# Altium PCB breaker.PcbDoc (part 2 of 2)
Units mil, origin at the board's own origin, x right, y up, seen from the top; angles counter-clockwise.
Board outline 1955 x 4025 mil, 2 copper layers (Top Layer, Bottom Layer); 93 components, 54 nets, 301 pads, 212 vias.
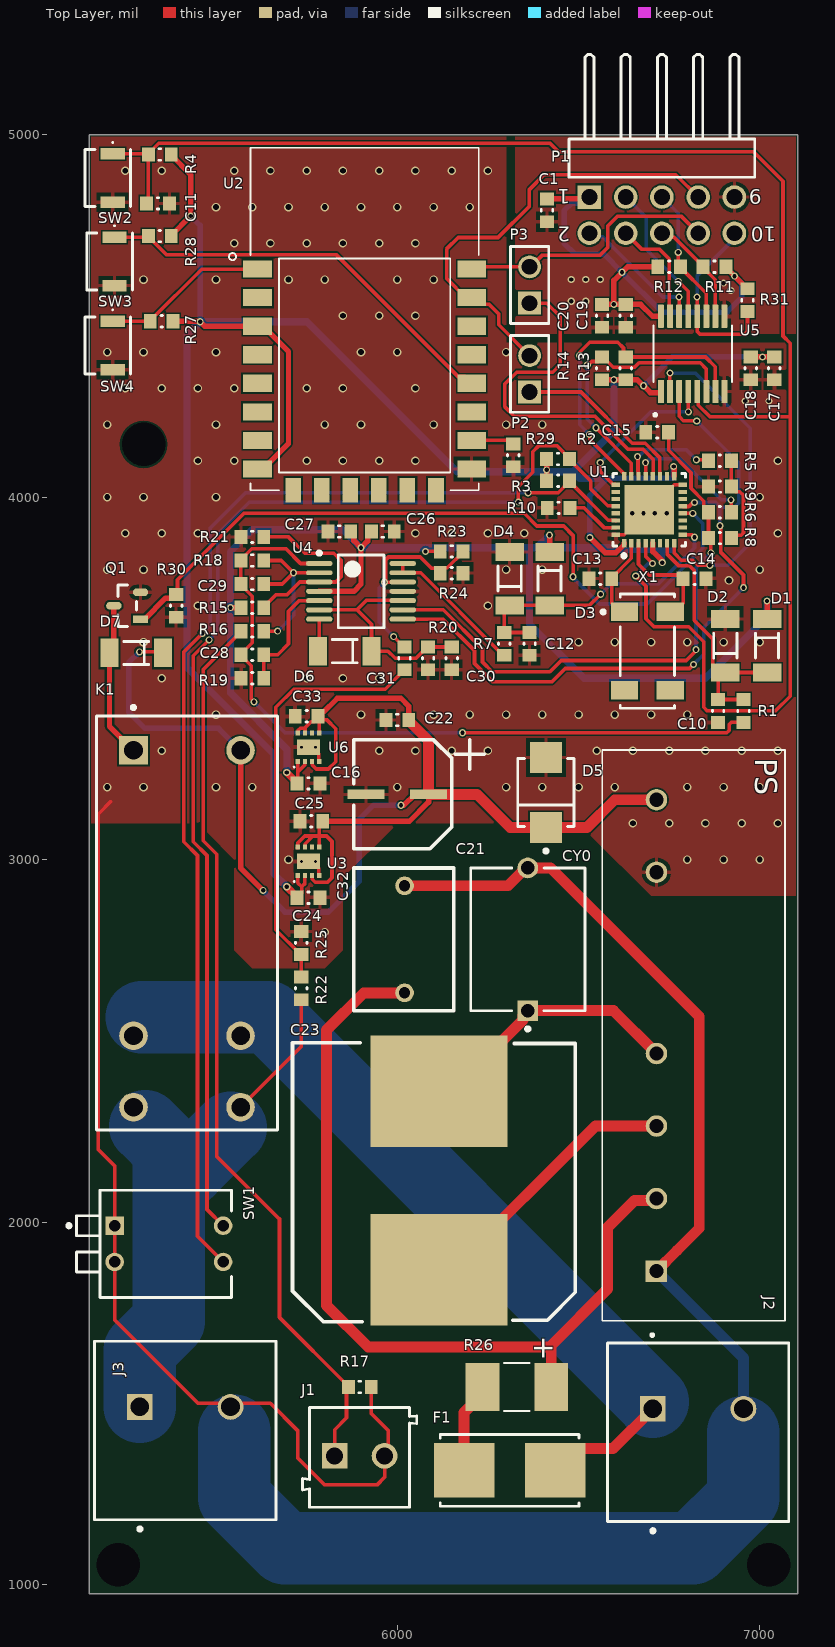
[diagram p0: Top Layer view]

## Via types
v1: diameter 23.62, hole 15.75, Top Layer to Bottom Layer, tented both sides, 133 vias
v2: diameter 19.68, hole 11.81, Top Layer to Bottom Layer, tented both sides, 71 vias
v3: diameter 19.68, hole 7.87, Top Layer to Bottom Layer, 4 vias
v4: diameter 19.68, hole 11.81, Top Layer to Bottom Layer, 3 vias
v5: diameter 23.62, hole 15.75, Top Layer to Bottom Layer, 1 vias

## Nets (pads, with @x,y where several pads share a name; then routed paths per layer and width w, separated by ;. In a path a pad name is that pad's centre, name@x,y a point inside that pad or via, vN(x,y) a via of type N, cw(c..) or ccw(c..) an arc to the next point about the centre after c; other vN are vias at no path point) (continued)
3V3_D: (continued)
  Top Layer w10: C24.2 5736.22,2907.72 5736.22,2924.8 ; U3.1 5725.47,2935.55 5736.22,2924.8 ; U3.2 5745.16,2933.74 5736.22,2924.8
  Top Layer w15: R28.2 5376.5,4721.97 v2(5430,4775.47) 5430,4889.53 5376.5,4943.03 R4.2 ; R27.2 5455,4485 v2(5456.25,4483.75) 5468.74,4471.26 U2.3 5630.2,4471.26 5700,4401.46 5700,4147.36 5630.2,4077.56 U2.8 ; R3.2 v2(6412.01,4075) R2.2 ; v2(6531.27,3888.27) 6531.73,3888.27 6574,3846 6602.34,3846 6626.1,3869.76 U1.1 ; R14.2 v2(6597.5,4323.5) R13.2 6662.5,4323.5 6698,4288 6726.93,4288 6727.5,4288.57 U5.1 ; v2(6762.45,4084.37) 6762.45,4083.1 6763.62,4081.93 6763.62,4057.8 U1.17 ; C18.1 v2(7007.5,4386.5) C17.1
  Top Layer w20: v2(5695,2925) 5695.47,2925 5723.5,2896.97 C24.2
  Bottom Layer w15: v2(5430,4775.47) 5456.25,4749.22 v2(5456.25,4483.75) ; v2(6531.27,3888.27) 6531.27,4004.73 6578.03,4051.5 C7.2 C5.1 C3.1 6761.55,4053.05 6761.55,4083.47 v2(6762.45,4084.37) ; v2(6679,4307) 6758.5,4386.5 v2(7007.5,4386.5)
  Bottom Layer w20: v2(5695,2925) 5660,2960 5660,3290 5420,3530 5420,4447.5 v2(5456.25,4483.75) 5751.25,4483.75 6165,4070 6412.01,4070 6485,4070 ; C9.1@6578.03,4051.5 6503.5,4051.5 6485,4070 ; v2(6597.5,4323.5) 6597.5,4182.5 6485,4070
3V3_EXT: C1.2 C19.2 C20.2 P1.1 R11.2 R12.2 R31.2 U5.16 | length 1412.4
  Top Layer w15: C1.2 6524.98,4822.5 P1.1 ; C20.2 v2(6597.5,4531.5) ; R12.2 6635,4635 v2(6620,4620) 6597.5,4597.5 v2(6597.5,4531.5) ; U5.16 6704.26,4498.74 6671.5,4531.5 C19.2 v2(6597.5,4531.5) ; R11.2 6906.5,4633.03 v2(6930.16,4609.37) 6953.81,4585.71 6953.81,4584.71 6964.03,4574.5 R31.2
  Bottom Layer w15: P1.1 6512.48,4810 6480,4810 6460,4790 6460,4700 6490,4670 6570,4670 v2(6620,4620) 6730,4510 6910,4510 6950,4550 6950,4589.53 v2(6930.16,4609.37)
5V: C21.1 C22.2 C25.2 C33.2 D5.1 D7.1 K1.8 PS.14 U3.3 U3.5 U3.7 U3.8 U6.3 U6.5 U6.7 U6.8 | length 4089.7
  Top Layer w10: v2(5289,3573) 5350.82,3573 D7.1 ; U3.8@5724.57,3032.92 5725,3033.35 5725,3045 5745,3065 5767.12,3065 ; U6.8 5726.38,3350.28 5726.38,3356.21 5732.24,3362.07 5743.94,3362.07 ; U3.7 5746.06,3035.28 5746.06,3043.94 5767.12,3065 ; U6.7 5746.06,3350.28 5746.06,3362.07 5743.94,3362.07 ; U3.3 5765.75,2954.72 5765.75,2946.06 5774.07,2937.74 5807.74,2937.74 5820,2950 5820,3050 5805,3065 5784.53,3065 ; U6.3 5765.75,3269.72 5765.75,3261.06 5776.81,3250 5810,3250 5830,3270 5830,3361.22 5805.98,3385.24 C33.2@5794.76,3385.24 ; U3.5 5784.53,3065 ; U6.5 C33.2@5784.53,3390 ; C25.2 5784.53,3095.94 5784.53,3065 ; C33.2@5794.76,3405.24 C33.2@5794.76,3385.24 ; 5743.94,3362.07 5762.18,3380.31 5768.78,3380.31 5781.5,3393.03 C33.2@5784.53,3390 ; 5767.12,3065 5784.53,3065 ; C33.2@5784.53,3390 5789.29,3385.24 C33.2@5794.76,3385.24
  Top Layer w15: K1.8 5567.64,2977.36 v2(5630,2915) ; C25.2 6033.71,3105.68 6086.61,3158.59 C21.1 6048.23,3180 6018.23,3150 v2(6010,3150) ; C33.2@5794.76,3405.24 5834.53,3445 6010,3445 6031.5,3423.5 C22.2
  Top Layer w30: C22.2 6031.5,3383.03 6086.61,3327.91 C21.1 6220,3180 6311.46,3088.54 D5.1 6523.54,3088.54 6600,3165 PS.14
  Bottom Layer w15: v2(5289,3573) 5259,3543 5259,3407 5304,3362 5507.02,3362 K1.8 ; v2(5630,2915) 5690,2855 5810,2855 5895,2940 5895,3110 5935,3150 v2(6010,3150)
ACL: F1.1 J2.1 K1.3 K1.6 | length 2189
  Top Layer w30: F1.1 6495.5,1375 6595,1375 J2.1
  Bottom Layer w200: 5295,2565 5645,2565 J2.1@6705,1505
DUART_RX: U1.25 U5.4 | length 439.6
  Top Layer w10: v2(6560,4095) 6560.31,4094.69 6560.31,4070.16 6595.67,4034.8 6601.57,4034.8 U1.25 ; U5.4 6802.75,4291.01 6802.75,4235.25 v2(6803,4235)
  Bottom Layer w10: v2(6560,4095) 6700,4235 v2(6803,4235)
DUART_TX: U1.8 U5.2 | length 929.1
  Top Layer w10: v2(6752,4342) 6752,4291.76 U5.2 ; U1.8 6763.9,3845.73 6783.63,3826 6815,3826 6829.13,3811.87 v2(6862.24,3811.87)
  Bottom Layer w10: v2(6752,4342) 6822,4342 6974,4190 6974,3873 6912.87,3811.87 v2(6862.24,3811.87)
ESP_RX: P1.7 P2.2 U2.21 | length 1247
  Top Layer w10: P2.2 6280,4475 6280,4505 6253.62,4531.38 6223.62,4531.38 U2.21 6189.25,4550 6136,4603.25 6136,4684 6168,4716 6278,4716 6364.5,4802.5 6364.5,4848.5 6405,4889 6768.52,4889 P1.7
ESP_RX_STM: P2.1 U1.19 | length 485.1
  Top Layer w10: P2.1 6365.31,4289.69 6506.77,4289.69 6648.14,4148.31 6677.95,4148.31 6683.79,4148.31 6724.53,4107.58 U1.19
ESP_TX: P1.8 P3.2 U2.22 | length 739.8
  Top Layer w10: U2.22 6211.26,4635 P3.2 6367.62,4635 6399.19,4666.57 6558.57,4666.57 6581,4689 6581,4748 6608,4775 6782.52,4775 P1.8
ESP_TX_STM: P3.1 U1.20 | length 986.5
  Top Layer w10: P3.1 6412,4535 6450,4497 6450,4366 6428.5,4344.5 6329.5,4344.5 6296,4311 6296,4250 6323,4223 6545.47,4223 6636.15,4132.31 6671.33,4132.31 6677.16,4132.31 6705.84,4103.63 6705.84,4084.43 6705.75,4084.33 6705.75,4058.43 U1.20
EXT_RST: P1.10 R31.1 U5.12 | length 513.3
  Top Layer w10: v2(6827,4552) 6827.5,4551.5 U5.12 6827.5,4456.5 6835,4449 6958,4449 6966,4457 R31.1
  Bottom Layer w10: v2(6827,4552) 6827,4610 6930,4713 P1.10
EXT_RX: P1.3 U5.13 | length 400.2
  Top Layer w10: v2(6775,4595) 6802.5,4567.5 U5.13
  Bottom Layer w10: P1.3 6686.52,4771 6686.52,4683.48 v2(6775,4595)
EXT_SWDCLK: P1.6 R11.1 U5.10 | length 303.3
  Top Layer w10: P1.6 6740.52,4717 6763.47,4717 6843.5,4636.97 R11.1 6843.5,4633.03 6877.5,4599.04 U5.10
EXT_SWDIO: P1.5 R12.1 U5.11 | length 379.5
  Top Layer w10: v2(6775,4675) 6775,4641.5 R12.1 6781.5,4633.03 6852.5,4562.03 U5.11
  Bottom Layer w10: P1.5 6775,4782.52 v2(6775,4675)
EXT_TX: P1.4 U5.15 | length 308.2
  Top Layer w10: P1.4 6673.48,4684.04 6722.42,4684.04 6750,4656.46 6750,4501.24 U5.15
FAULT_ISR: U1.13 U4.8 U5.3 | length 2001.5
  Top Layer w10: U4.8 6126.23,3663.23 6213,3576.45 6213,3541 6264,3490 6426,3490 6463,3527 6806,3527 v2(6817,3538) ; U5.3 6777.5,4222.5 6789.16,4210.84 6825.16,4210.84 v2(6826,4210) ; U1.13 6788.43,3973.94 6804.46,3973.94 6815.52,3985 v2(6820,3985) ; v2(6890,3921) 6891.85,3919.15 6891.85,3848.15 6955,3785 v2(6955,3750)
  Bottom Layer w10: v2(6817,3538) 6845,3566 6845,3640 v2(6955,3750) ; v2(6820,3985) 6878.36,3985 6889,3974.36 ; v2(6826,4210) 6941.59,4094.41 6941.59,3983.62 6929.38,3971.41 6891.95,3971.41 6889,3974.36 ; v2(6890,3921) 6890,3973.36 6889,3974.36
FAULT_OUT: P1.2 U5.14 | length 373.2
  Top Layer w10: v2(6777,4552) 6777.5,4551.5 U5.14
  Bottom Layer w10: P1.2 6540.33,4717.19 6566.81,4717.19 6732,4552 v2(6777,4552)
GND: C2.2 C3.2 C4.2 C5.2 C6.1 C7.1 C8.2 C9.2 C10.1 C11.1 C12.1 C13.1 C14.1 C15.1 C16.1 C17.2 C18.2 C21.2 C22.1 C24.1 C25.1 C26.1 C27.2 C30.1 C32.1 C33.1 CY0.2 D2.2 D4.2 D5.2 J1.2 J2.2 J3.2 PS.1 PS.12 Q1.2 R9.2 R10.1 R17.1 R19.1 R20.1 R21.1 R24.1 R25.1 R29.1 R30.1 SW1.1 SW1.2 SW2.2 SW3.2 SW4.2 U1.16 U1.32 U1.33 U2.15 U3.4 U3.9 U4.11 U5.8 U6.4 U6.9 | length 7225.7
  Top Layer w10: 5210,3160 5175,3125 5175,2200 5220.39,2154.61 SW1.1 SW1.2 5220.39,1729.61 5450,1500 5530,1500 J3.2 5550,1500 5650,1500 5725,1425 5725,1350 5800,1275 5944.14,1275 5965,1295.86 J1.2 5975,1365 5975,1425 5927.99,1472.01 R17.1 ; U3.9 5764.84,2995 5783.62,2976.22 5783.62,2956.54 U3.4 ; U6.9 5764.84,3310 5783.62,3291.22 5783.62,3271.54 U6.4 ; U1.32 6626.1,3896.1 6763.9,4033.9 U1.16
  Top Layer w30: C32.1 6305.21,2927.64 6354.42,2976.85 6423.15,2976.85 6833,2567 6833,1983 6772.11,1922.11 PS.1 ; PS.12@6707.05,2965 PS.12
  Bottom Layer w10: C6.1 C6.1@6648,3924.5
  Bottom Layer w30: PS.1 6955,1625 J2.2
  Bottom Layer w200: 5550,1425 5550,1240 5690,1100 6815,1100 6955,1240 6955,1420
  other v1: 5800,2800 5700,3000 6800,3000 6900,3000 7000,3000 6650,3100 6750,3100 6850,3100 6950,3100 7050,3100 5200,3200 5300,3200 5500,3200 5600,3200 6000,3200 6300,3200 6400,3200 6500,3200 6600,3200 6800,3200 6900,3200 7000,3200 5350,3300 5950,3300 6050,3300 6150,3300 6250,3300 6550,3300 6650,3300 6750,3300 6850,3300 6950,3300 7050,3300 5500,3400 5900,3400 6100,3400 6200,3400 6300,3400 6400,3400 6500,3400 6600,3400 6700,3400 6800,3400 5350,3500 5750,3500 5850,3500 5950,3500 5300,3600 6500,3600 6600,3600 6700,3600 6800,3600 6900,3600 7000,3600 5450,3700 6250,3700 5200,3800 5300,3800 6300,3800 6400,3800 7000,3800 5250,3900 5350,3900 5450,3900 6050,3900 6150,3900 6250,3900 6350,3900 7050,3900 5200,4000 5300,4000 5500,4000 7000,4000 5450,4100 5550,4100 5750,4100 5850,4100 5950,4100 6050,4100 7050,4100 5200,4200 5500,4200 5800,4200 5900,4200 6100,4200 6300,4200 6400,4200 5250,4300 5350,4300 5450,4300 5550,4300 5750,4300 5850,4300 6050,4300 5200,4400 5300,4400 5500,4400 5900,4400 6000,4400 6300,4400 5850,4500 5950,4500 6050,4500 5300,4600 5500,4600 5700,4600 5800,4600 6000,4600 6100,4600 5550,4700 5650,4700 5750,4700 5850,4700 5950,4700 6050,4700 5500,4800 5600,4800 5700,4800 5800,4800 5900,4800 6000,4800 6100,4800 6200,4800 5250,4900 5350,4900 5550,4900 5650,4900 5750,4900 5850,4900 5950,4900 6050,4900 6150,4900 6250,4900
  other v2: 6648,3955 6679,3955 6710,3955 6743,3955
  other v3: 5735.31,2995 5774.69,2995 5735.31,3310 5774.69,3310
  other v4: 6960,4265 7025,4265
  other v5: 6915,3770
GNDP: C1.1 C19.1 C20.1 P1.9 U5.9 | length 2.5
  Top Layer w10: P1.9@6930,4825 P1.9
  other v2: 6480,4540 6520,4540 6920,4570 6900,4590 6480,4600 6520,4600 6560,4600
IMON: J1.1 R16.1 R17.2 | length 2499.8
  Top Layer w10: R16.1 5568.5,3628.03 5465,3524.53 5465,3052 5502,3015 5502,2181 5674,2009 5675,2009 5675,1736.97 5865,1546.97 R17.2 5860,1540 5860,1460 5827.2,1427.2 J1.1
NetC13_2: C13.2 U1.2 X1.1 | length 233.3
  Top Layer w10: X1.1 6615.2,3683.27 6591.5,3706.97 C13.2 6591.5,3776.97 6645.79,3831.26 U1.2
NetC14_2: C14.2 U1.3 X1.4 | length 305.7
  Top Layer w10: U1.3 6665.47,3814.53 6695,3785 6778.5,3785 C14.2 ; X1.4 6764.8,3683.27 6788.5,3706.97 C14.2@6788.5,3770
NetC15_2: C15.2 R6.1 R8.1 U4.9 | length 1593
  Top Layer w10: U4.9 6127.18,3688.82 6235,3581 6235,3545 6262,3518 6421,3518 6452,3549 6797,3549 6808.16,3560.16 6808.16,3560.38 6824.16,3576.38 v2(6824.16,3579) ; C15.2 6748.5,4128.98 6810.33,4067.14 6810.33,4024.18 6845.79,3988.72 6845.79,3972.62 6858.5,3959.9 R6.1 R8.1 6865,3880.4 v2(6865,3846)
  Bottom Layer w10: v2(6824.16,3579) 6824.16,3805.16 v2(6865,3846)
NetC23_1: C23.1 PS.5 | length 764.1
  Top Layer w30: C23.1 6150.43,1868.94 6546.5,2265 PS.5
NetC23_2: C23.2 CY0.1 PS.7 | length 748.3
  Top Layer w30: C23.2 6150.43,2361.06 6346.46,2557.09 6346.46,2569.61 CY0.1 6596.85,2583.15 PS.7
NetC28_1: C28.1 C29.2 R1.2 R18.2 U4.1 | length 2085.4
  Top Layer w10: v2(5605,3435) 5597.22,3442.78 5597.22,3534.31 5568.5,3563.03 C28.1 5568.5,3566.97 5600,3598.46 5600,3726.54 5568.5,3758.03 C29.2 R18.2 5568.5,3826.97 5598.54,3857 5693,3857 5733.23,3816.77 U4.1 ; v2(6180,3350) 6180.21,3349.79 6909.24,3349.79 6915.69,3356.23 6915.69,3372.65 6921.54,3378.5 R1.2
  Bottom Layer w10: v2(5605,3435) 5690,3350 v2(6180,3350)
NetC28_2: C28.2 R19.2 U4.5 | length 333
  Top Layer w10: R19.2 C28.2 5670,3565 5700,3595 5700,3685 5729.41,3714.41 U4.5
NetC29_1: C29.1 R16.2 R18.1 U4.2 | length 480.4
  Top Layer w10: R16.2 v2(5670,3630) ; C29.1 5682.64,3760 v2(5713.82,3791.18) ; R18.1 5680,3825 v2(5713.82,3791.18) ; U4.2 v2(5713.82,3791.18)
  Bottom Layer w10: v2(5670,3630) 5713.82,3673.82 v2(5713.82,3791.18)
NetC30_2: C30.2 D6.1 R20.2 U4.6 U4.10 | length 614.3
  Top Layer w10: U4.6 5888.82,3688.82 ; U4.10 6014.57,3715 5915,3715 5888.82,3688.82 ; C30.2 R20.2 6083.03,3586.5 6051.54,3555 5994.21,3555 5974.21,3575 D6.1 5928.82,3648.82 5888.82,3688.82
NetC31_1: C31.1 R22.1 R25.2 | length 1171.5
  Top Layer w10: R22.1 R25.2 5733.03,2738.5 5665,2806.54 5665,3420 5715,3470 5966.5,3470 C31.1
NetC31_2: C31.2 R23.1 R24.2 U4.12 | length 591.5
  Top Layer w10: v2(5990,3615) 5990,3614.53 6018.03,3586.5 C31.2 ; U4.12 6014.57,3765 v2(5965,3765) 5967.74,3767.74 5967.74,3826.54 5975.86,3834.66 6063.31,3834.66 6093.93,3804.04 6105.79,3804.04 6118.5,3791.32 R24.2 6118.5,3791.97 6131.22,3804.69 6138.15,3804.69 6181.5,3848.03 R23.1
  Bottom Layer w10: v2(5965,3765) 5950,3750 5950,3655 v2(5990,3615)
NetC32_2: C32.2 PS.3 R26.2 | length 2359.6
  Top Layer w10: R26.2 R26.2@6425,1544.68
  Top Layer w30: C32.2 5907.36,2632.36 5805,2530 5805,1770 5920,1655 6420,1655 6424.69,1659.68 ; R26.2 6424.69,1659.68 ; PS.3 6709.38,2059.38 6654.38,2059.38 6580,1985 6580,1815 6424.69,1659.68
NetD6_2: D6.2 U4.7 | length 89.7
  Top Layer w10: D6.2 5784.84,3578.66 U4.7
NetD7_2: D7.2 K1.1 Q1.3 | length 431
  Top Layer w15: Q1.3 5218.19,3582.01 D7.2 5206.18,3367.56 K1.1
NetF1_2: F1.2 R26.1 | length 251
  Top Layer w30: F1.2 6184.5,1474.5 6235.31,1525.32 R26.1
NetR2_1: R2.1 SW1.4 U1.28 | length 3312
  Top Layer w10: v2(5481,3606) 5437,3562 5437,3049.22 5475,3011.22 5475,2034.61 SW1.4 ; v2(6334,3986) 6334,4028.5 6374,4068.5 6374,4125 6391,4142 6439.97,4142 6476,4105.97 6476,4102.03 6533.98,4044.05 6533.98,4022.02 6580.25,3975.75 6601.57,3975.75 U1.28
  Bottom Layer w10: v2(5481,3606) 5505,3630 5505,3899 5592,3986 v2(6334,3986)
NetR3_1: R3.1 SW1.3 U1.30 | length 3318.1
  Top Layer w10: v2(5462.62,3624.38) 5411,3572.77 5411,3049.22 5449,3011.22 5449,1960.61 SW1.3 ; v2(6361,4012) 6443.97,4012 R3.1@6475,4043.03 ; R3.1 R3.1@6475,4043.03 ; U1.30 6601.57,3936.38 6581.65,3936.38 R3.1@6475,4043.03
  Bottom Layer w10: v2(5462.62,3624.38) 5484,3645.77 5484,3914.77 5581.23,4012 v2(6361,4012)
NetR5_1: R5.1 R8.2 R9.1 | length 258.6
  Top Layer w10: R8.2 6929.6,3895 6949.14,3895 6955,3900.86 6955,4005 6945,4015 6934.21,4015 6921.5,4027.72 R9.1 R5.1
NetR5_2: R5.2 U1.22 | length 271
  Top Layer w10: v2(6662.69,4111.47) 6664.16,4110.01 6664.16,4069.48 6664.57,4069.07 6664.57,4058.43 U1.22 ; v2(6825,4103) 6855.5,4103 R5.2
  Bottom Layer w10: v2(6662.69,4111.47) 6665.31,4111.47 6683.84,4130 6798,4130 v2(6825,4103)
NetR6_2: R6.2 U1.21 | length 358.9
  Top Layer w10: v2(6685,4095) 6685.08,4094.92 6685.08,4057.6 U1.21 ; v2(6920.75,3992.25) 6920.75,3958.68 R6.2
  Bottom Layer w10: v2(6685,4095) 6685.49,4095 6695.7,4105.21 6780.78,4105.21 6893.74,3992.25 v2(6920.75,3992.25)
NetR7_2: R7.2 U4.13 U4.14 | length 399.7
  Top Layer w10: U4.14 U4.13 6064.36,3791.18 6279.33,3576.22 6282.28,3576.22 R7.2
NetR10_2: R10.2 U1.31 | length 148.4
  Top Layer w10: R10.2 6515.79,3970 6570,3915.79 U1.31
NetR15_1: R15.1 R21.2 U4.3 | length 535.3
  Top Layer w10: R15.1 5631.5,3696.97 5664.53,3730 5695,3730 5730.59,3765.59 U4.3 5830.59,3765.59 5845,3780 5845,3825 5825,3845 5745,3845 5700,3890 R21.2
NetR27_1: R27.1 SW4.1 U2.1 | length 460.1
  Top Layer w10: SW4.1 R27.1 5318.5,4486.97 5460.28,4628.74 U2.1
NetR28_1: R28.1 SW3.1 U2.18 | length 1155.7
  Top Layer w10: SW3.1 5310.43,4716.93 R28.1 5313.5,4718.03 5362.73,4668.8 5831.2,4668.8 6167.6,4332.4 6186.38,4332.4 U2.18
NetR29_2: R29.2 U2.16 | length 119.1
  Top Layer w10: U2.16 6310.2,4156.3 R29.2
NRST: C11.2 R4.1 SW2.1 U1.4 U5.5 | length 4657.6
  Top Layer w10: SW2.1 5311.57,4946.93 R4.1 ; C11.2 5313.5,4815 R4.1 ; v2(6657.82,3782.08) 6686,3753.9 6686,3664 6707.94,3642.06 6803.94,3642.06 6845,3601 6845,3420 6855,3410 7043,3410 7083.86,3450.86 7083.86,4222 ; U1.4 6685.16,3835.84 v2(6704,3817) ; U5.5 6830.57,4288.19 6830.57,4253.43 6862,4222 7083.86,4222 ; R4.1 5313.5,4946.97 5342.22,4975.69 6421.31,4975.69 6444,4953 6982,4953 7064,4871 7064,4444 7083.86,4424.14 7083.86,4222
  Bottom Layer w10: v2(6657.82,3782.08) 6692.74,3817 v2(6704,3817)
RELAY_ON: Q1.1 R30.2 U1.12 | length 2064.6
  Top Layer w10: R30.2@5393.72,3735.22 5393.72,3771.71 5577.01,3955 6240,3955 6350,3955 6385,3920 6459.14,3920 6485,3894.14 v2(6485,3780) ; U1.12 6814.84,3955.16 v2(6815,3955)
  Top Layer w15: Q1.1 5302.37,3662.6 5361.06,3721.28 5379.78,3721.28 R30.2 R30.2@5393.72,3735.22
  Bottom Layer w10: v2(6485,3780) 6485,3778 6558,3705 6689.63,3705 6843,3858.37 6843,3927 v2(6815,3955)
SWDCLK: R13.1 U1.24 U5.7 | length 885.3
  Top Layer w10: v2(6503.31,4390) 6503.31,4399.31 6531,4427 6608,4427 6624,4411 6624,4392.5 R13.1 6850.5,4386.5 6877.5,4359.5 U5.7 ; v2(6529.83,4172.83) 6531.69,4170.98 6531.69,4157.84 6625.2,4064.33 6625.2,4058.43 U1.24
  Bottom Layer w10: v2(6503.31,4390) 6503.31,4199.35 v2(6529.83,4172.83)
SWDIO: R14.1 U1.23 U5.6 | length 781
  Top Layer w10: v2(6524.16,4364) 6526.78,4364 6536.56,4373.78 6554.25,4373.78 6566.97,4386.5 6595.69,4357.78 6654.24,4357.78 6666.96,4370.5 6835.5,4370.5 6852.5,4353.5 U5.6 ; v2(6548,4191) 6645.79,4093.2 U1.23
  Bottom Layer w10: v2(6524.16,4364) 6524.16,4214.83 v2(6548,4191)
V_IMON: C10.2 D1.2 D2.1 R1.1 U1.7 | length 716.6
  Top Layer w10: U1.7 6744.21,3842.79 6777,3810 6806.46,3810 6819,3797.46 6819,3659.71 6870.63,3608.08 6870.63,3535.79 6890.24,3516.18 D2.1@6904.61,3516.18 ; R1.1 C10.2 6885,3496.57 D2.1@6904.61,3516.18 ; D1.2 D2.1 D2.1@6904.61,3516.18
V_VMON: C12.2 D3.2 D4.1 R7.1 U1.9 | length 790.8
  Top Layer w10: C12.2 R7.1 6295,3686.18 D4.1 D3.2 6530.18,3701.18 v2(6561,3732) ; U1.9 6812.9,3896.1 v2(6820,3889)
  Bottom Layer w10: v2(6561,3732) 6590.23,3761.23 6720.69,3761.23 6820,3860.55 v2(6820,3889)
VMON: J3.1 K1.4 K1.5 R22.2 | length 1439.1
  Top Layer w10: K1.5 5735,2484.49 R22.2
  Bottom Layer w200: J3.1 5290,1646 5370,1726 5370,2095 ; 5305,2265 5370,2200 5370,2095 ; 5540,2260 5425,2145 5375,2095 5370,2095
pads on no net: U1.6 U1.10 U1.11 U1.14 U1.15 U1.18 U1.26 U1.27 U1.29 U2.2 U2.4 U2.5 U2.6 U2.7 U2.9 U2.10 U2.11 U2.12 U2.13 U2.14 U2.17 U2.19 U2.20 U3.6 U6.6 X1.2 X1.3

## Polygon pours and split planes (outlines as drawn)
GNDP on Bottom Layer "GNDP_L02_P004" (solid, pour order 4): 6326.49,5081.49 6326.49,4456.49 7151.49,4456.49 7151.49,5081.49
GND on Bottom Layer "GND_L02_P000" (solid, pour order 0): 5000,5100 6300,5100 6300,4425 7200,4425 7200,2900 6700,2900 6500,3100 6000,3100 5850,2950 5850,2750 5800,2700 5600,2700 5550,2750 5550,3000 5450,3100 5000,3100
GNDP on Top Layer "GNDP_L01_P003" (solid, pour order 3): 6325,5075 6325,4450 7150,4450 7150,5075
GND on Top Layer "GND_L01_P002" (solid, pour order 2): 5000,5100 6300,5100 6300,4425 7200,4425 7200,2900 6700,2900 6500,3100 6000,3100 5850,2950 5850,2750 5800,2700 5600,2700 5550,2750 5550,3000 5450,3100 5000,3100

## Silkscreen, mask and mechanical layers (free items; w line width, h text height)
Bottom Solder:
  lines w200: 5290,1489.5 5290,1645.5 5370,1725.5 5370,2094.5 5370,2199.5 5305,2264.5 ; 5297.36,2566.02 5647.36,2566.02 6707.36,1506.02 ; 5305,2265 5370,2200 ; 5405,2125 5540,2260 ; 5425,2144.5 5540,2259.5 ; 5550,1425 5550,1240 5690,1100 6815,1100 6955,1240 6955,1420
EdgeCut:
  the board outline again, w10

## Text inside footprints (layer, text, board x,y; h text height)
C23: Top Overlay "+" at 6378.17,1686.34 h60 r270
P1: Top Overlay "10" at 7044.96,4746.02 h40 r180; Top Overlay "9" at 7005.98,4848.39 h40 r180; Top Overlay "1" at 6477.64,4848.39 h40 r180; Top Overlay "2" at 6477.64,4746.02 h40 r180